# Altium PCB compactv2-5_changed.PcbDoc
Units mil, origin at the board's own origin, x right, y up, seen from the top; angles counter-clockwise.
Board outline 8000 x 8000 mil, 4 copper layers (LV, SIGLoop, OTHLoop, HV), stack 34.956 mil thick; 130 components, 24 nets, 206 pads, 4 vias.
Unrouted connection lines stored in the file: 27.
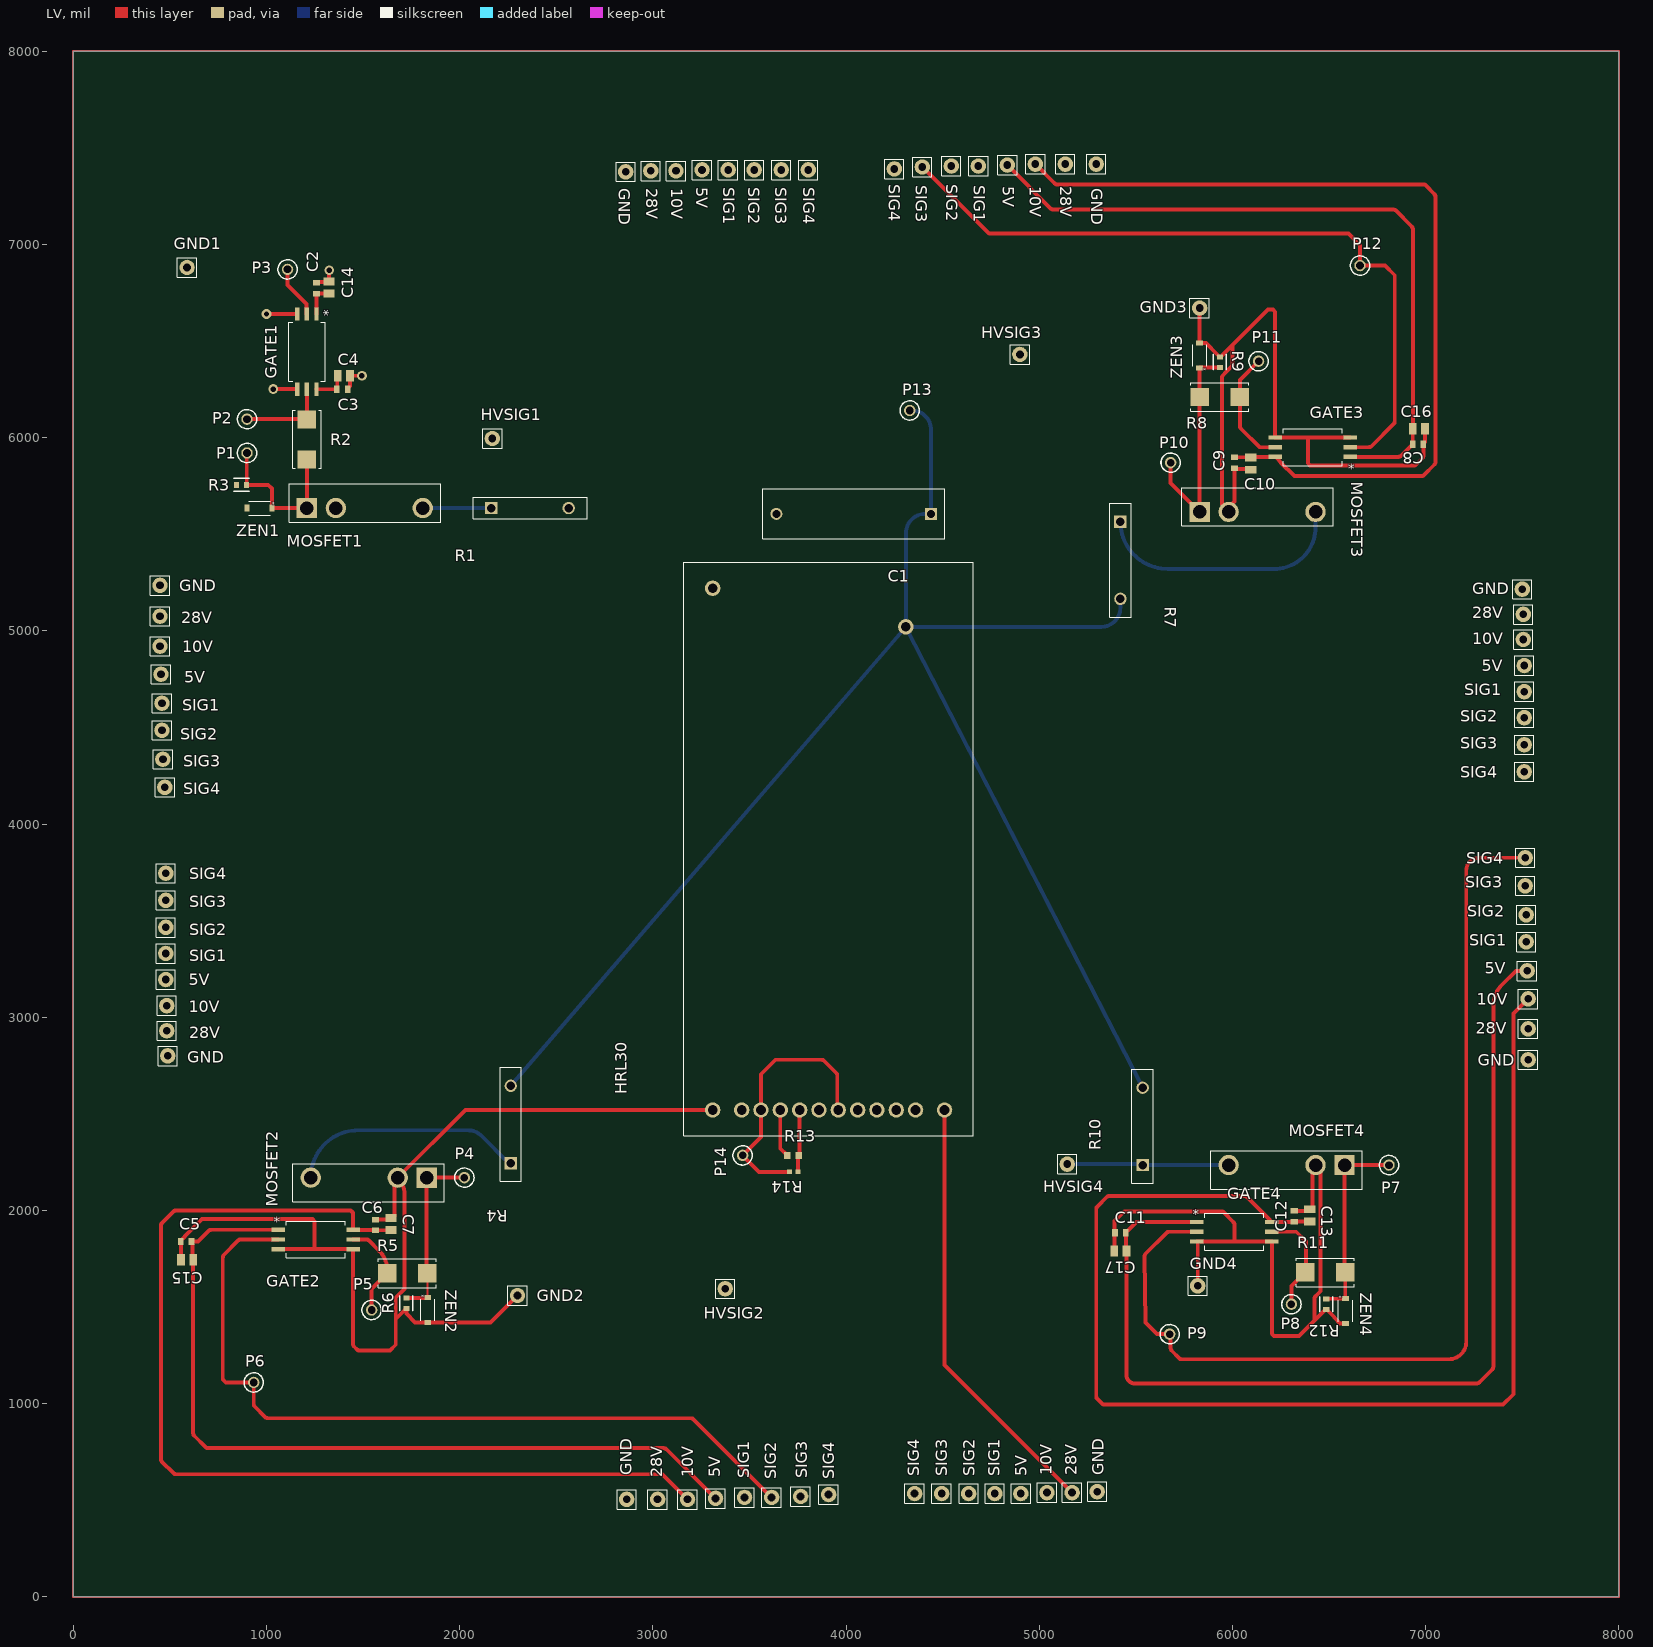
[diagram p0: LV view]
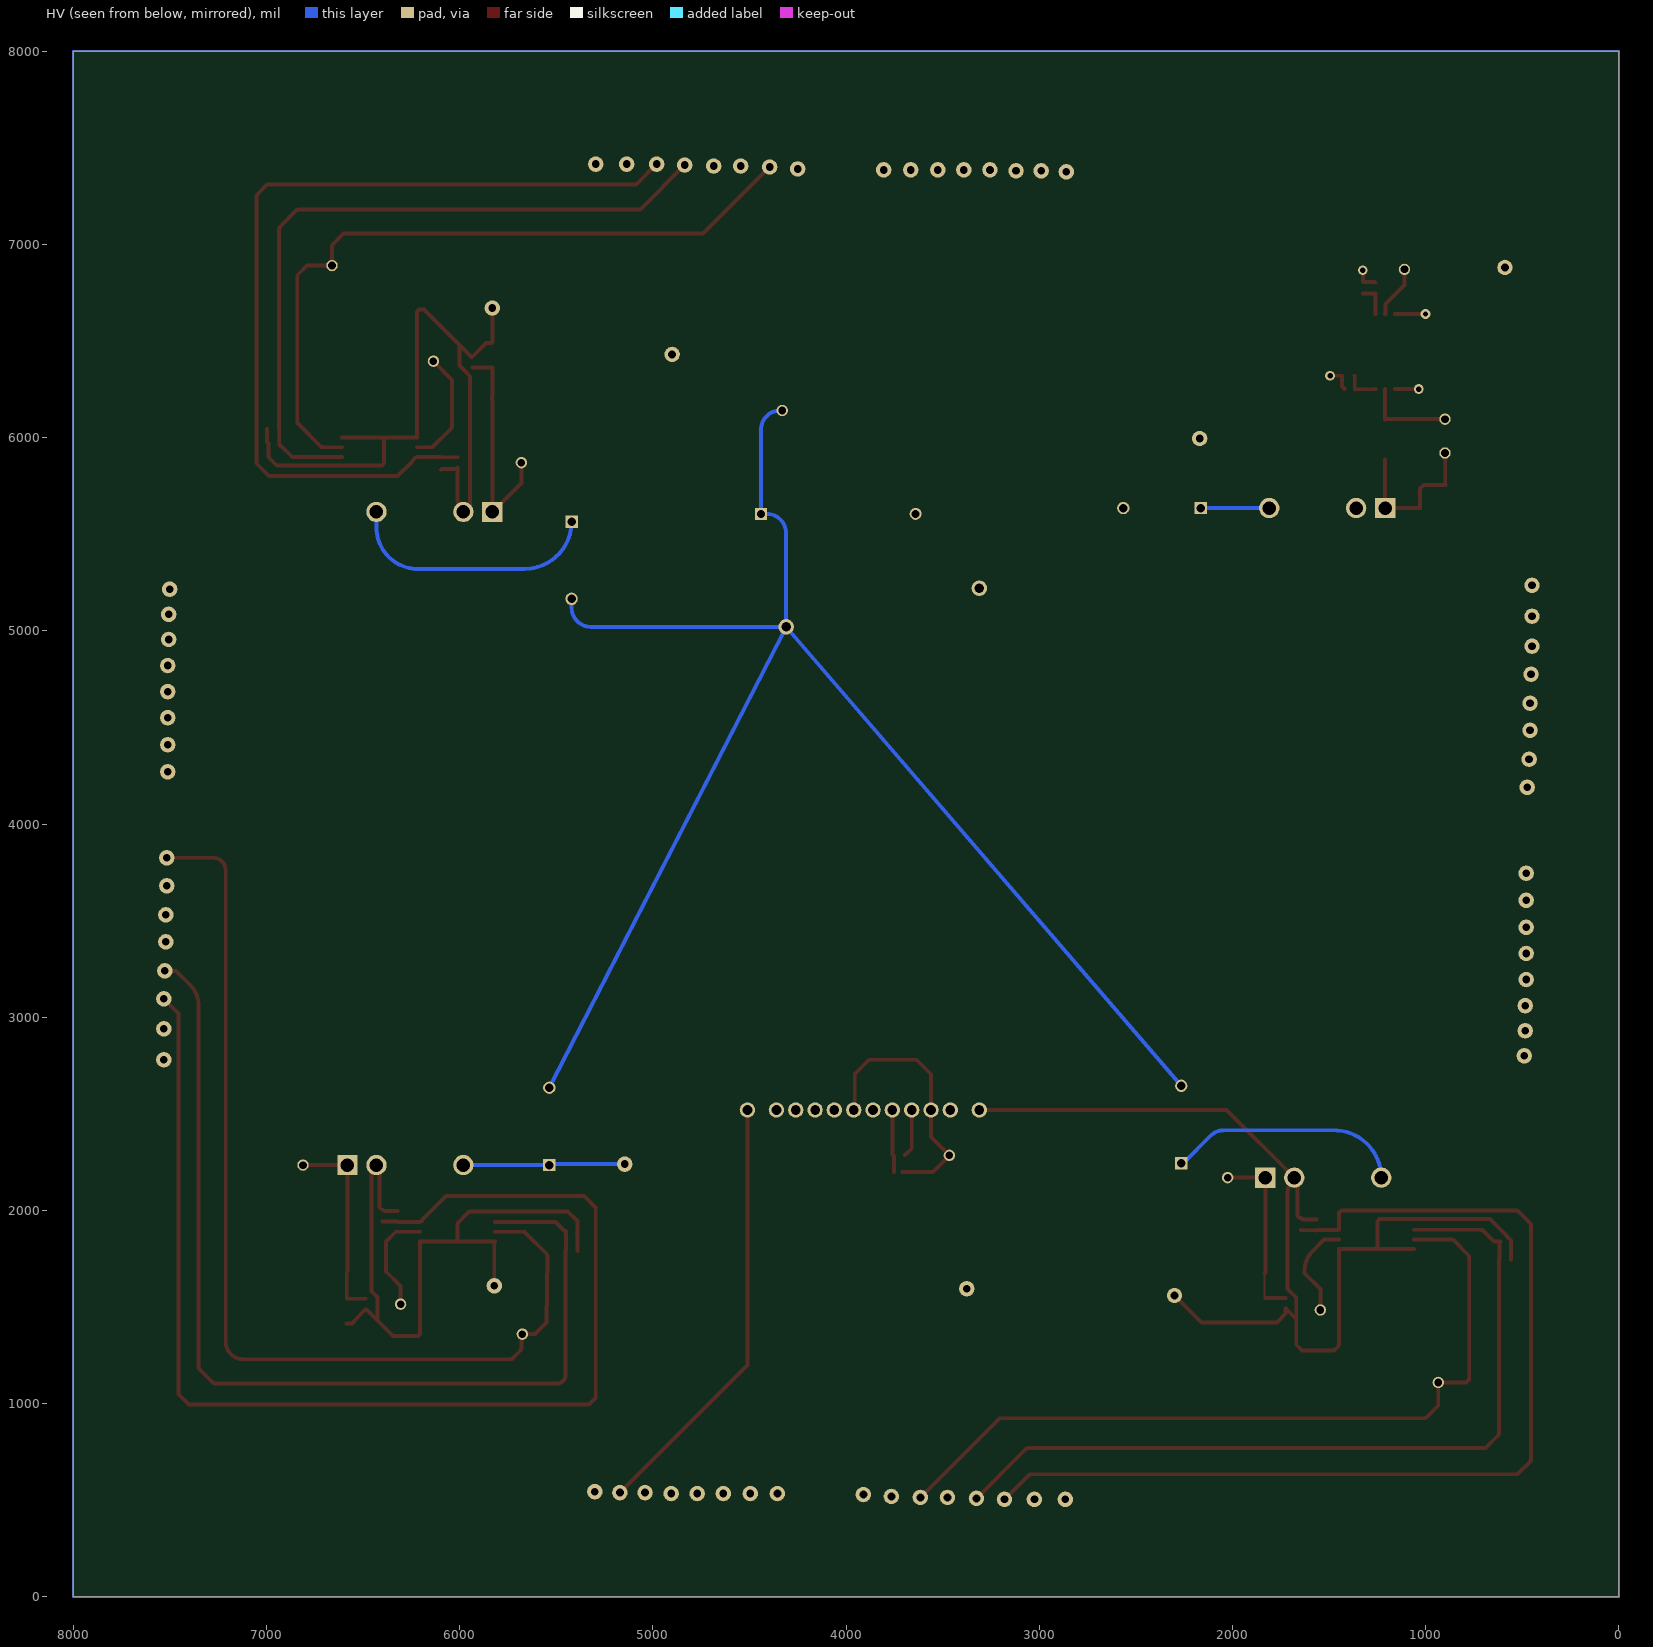
[diagram p1: HV view, seen from below]
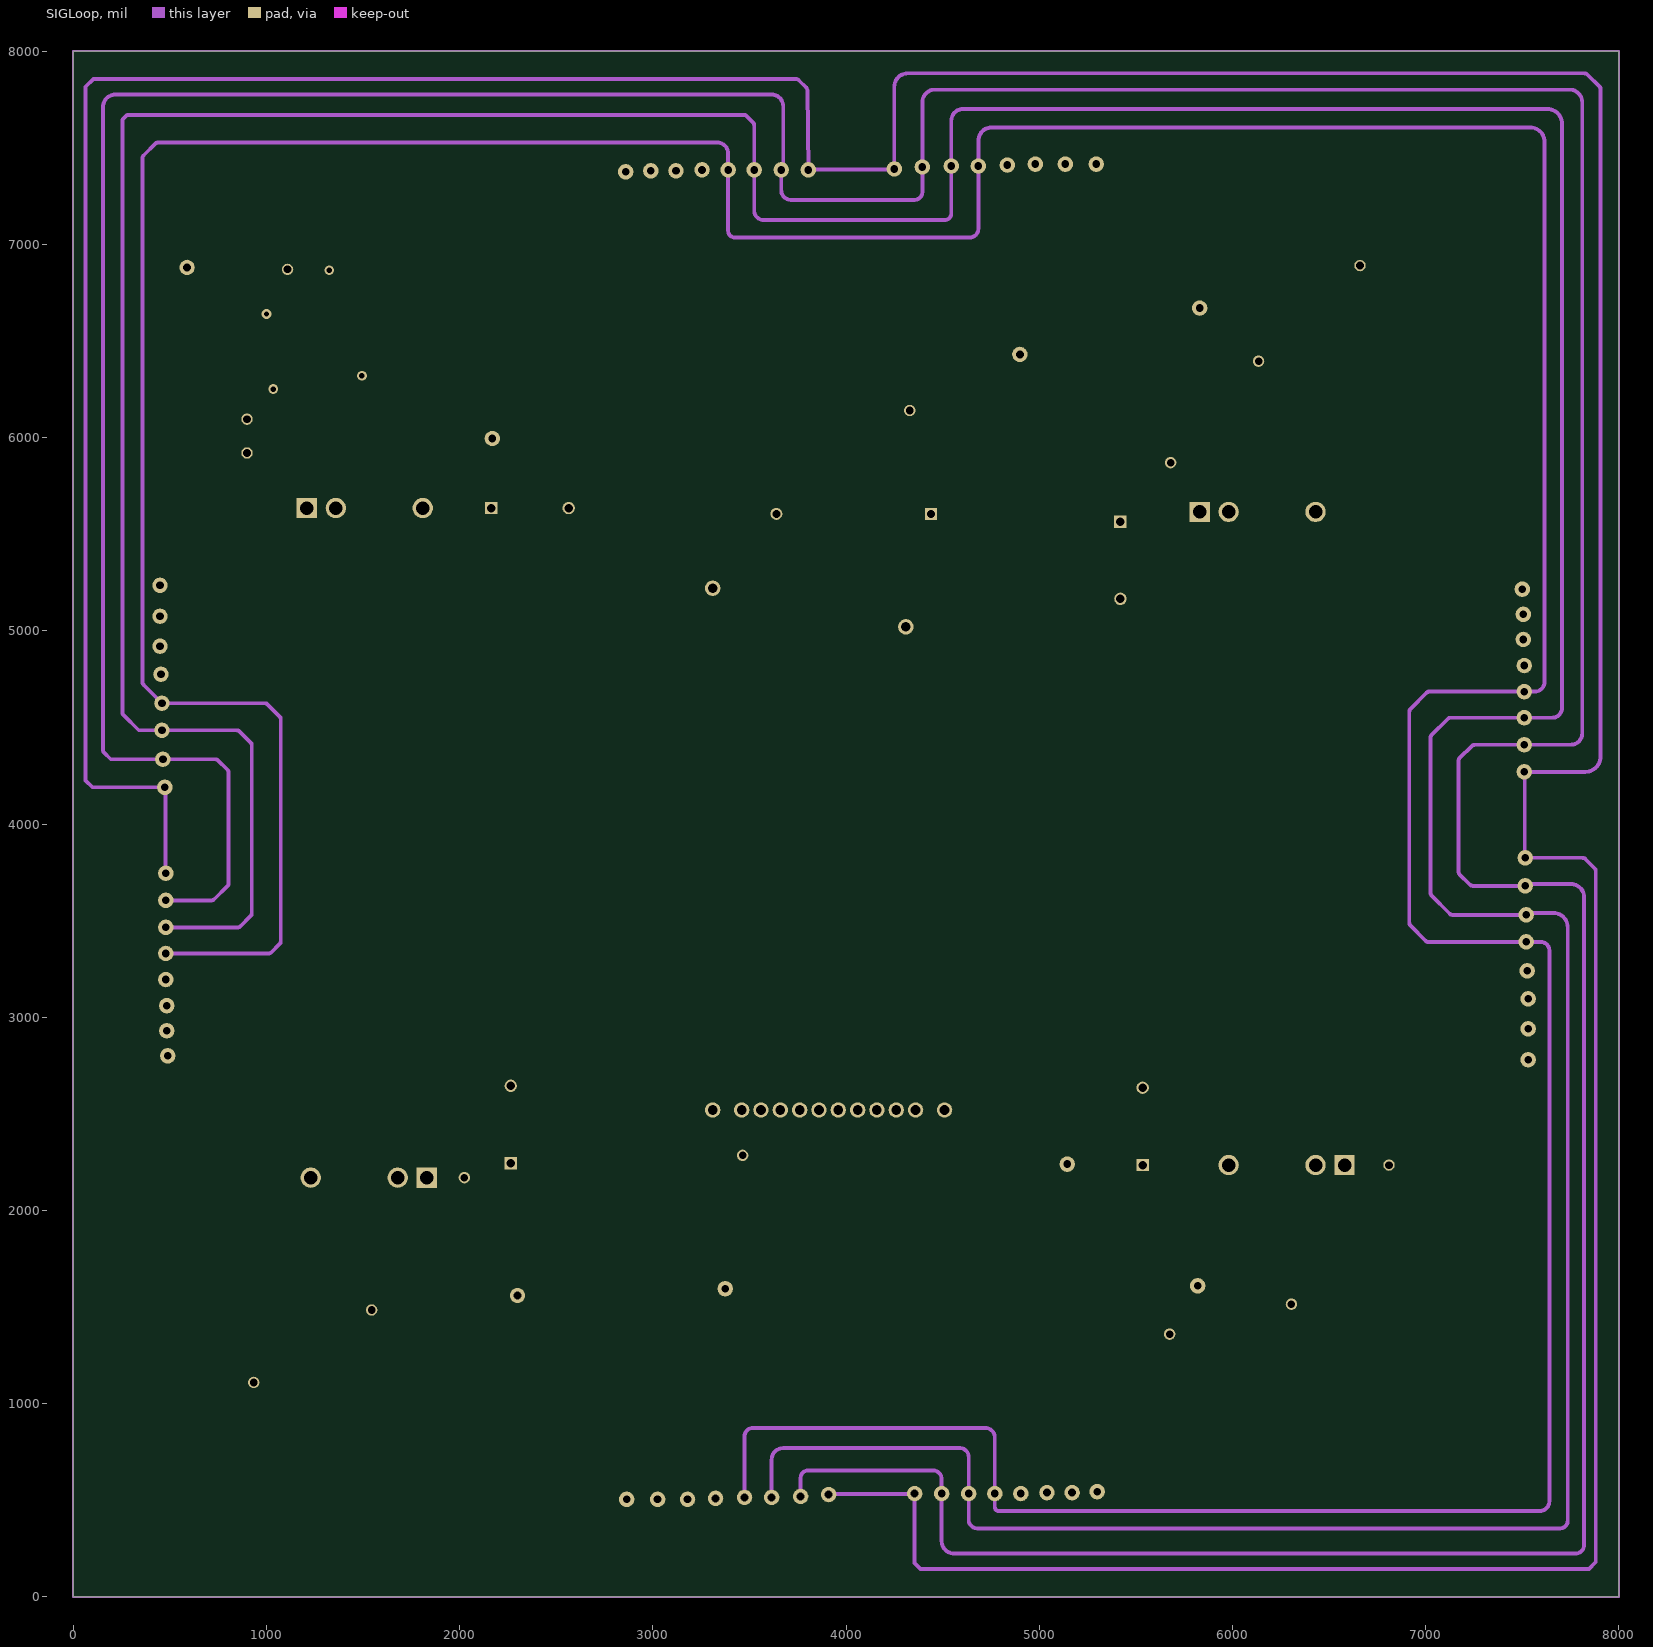
[diagram p2: SIGLoop]
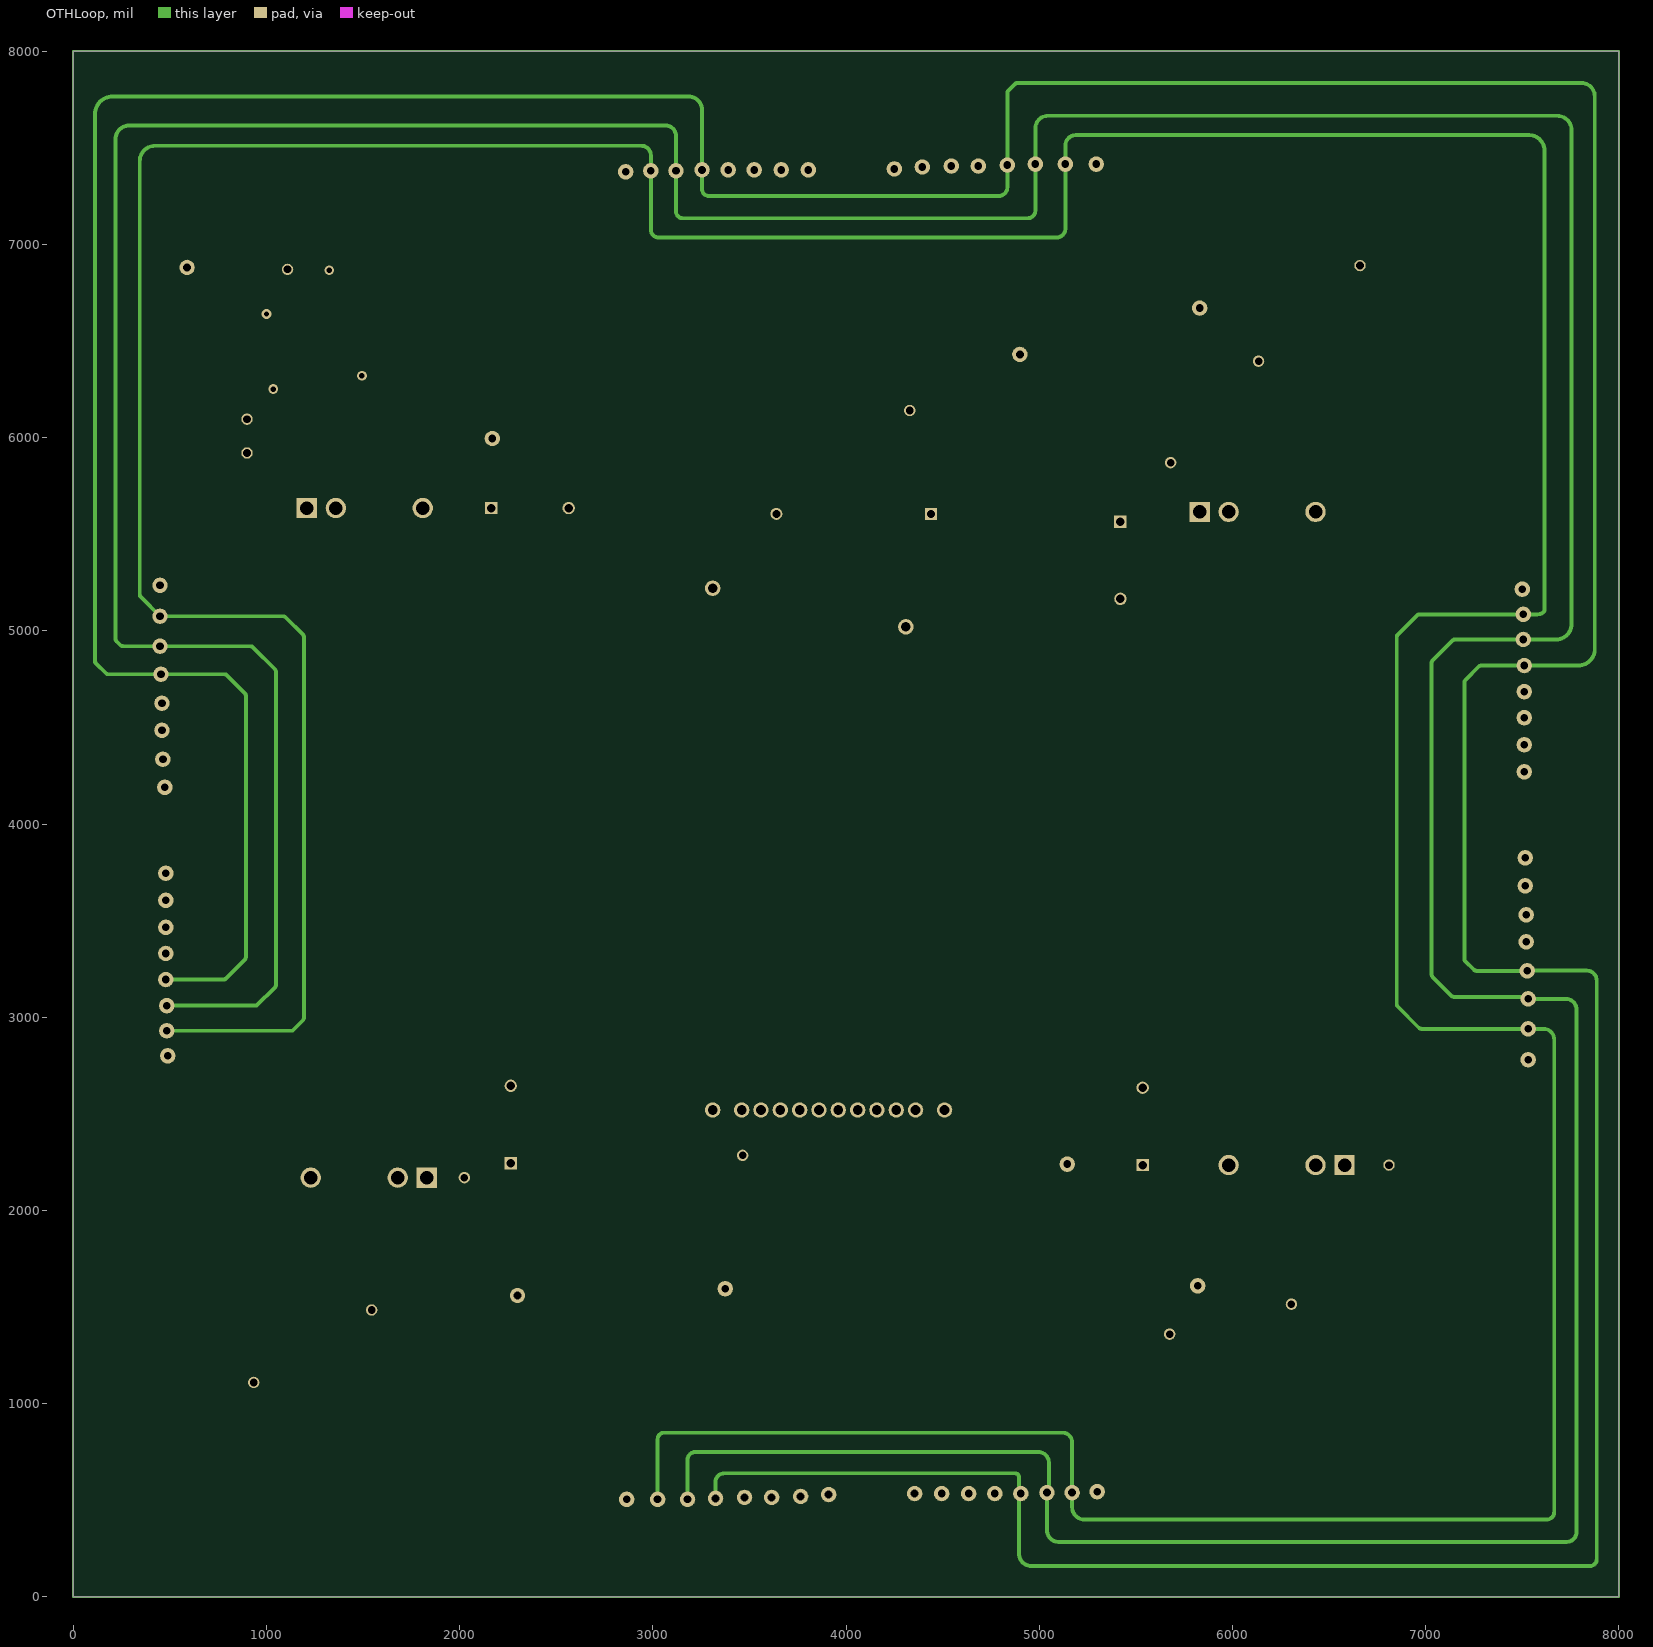
[diagram p3: OTHLoop]
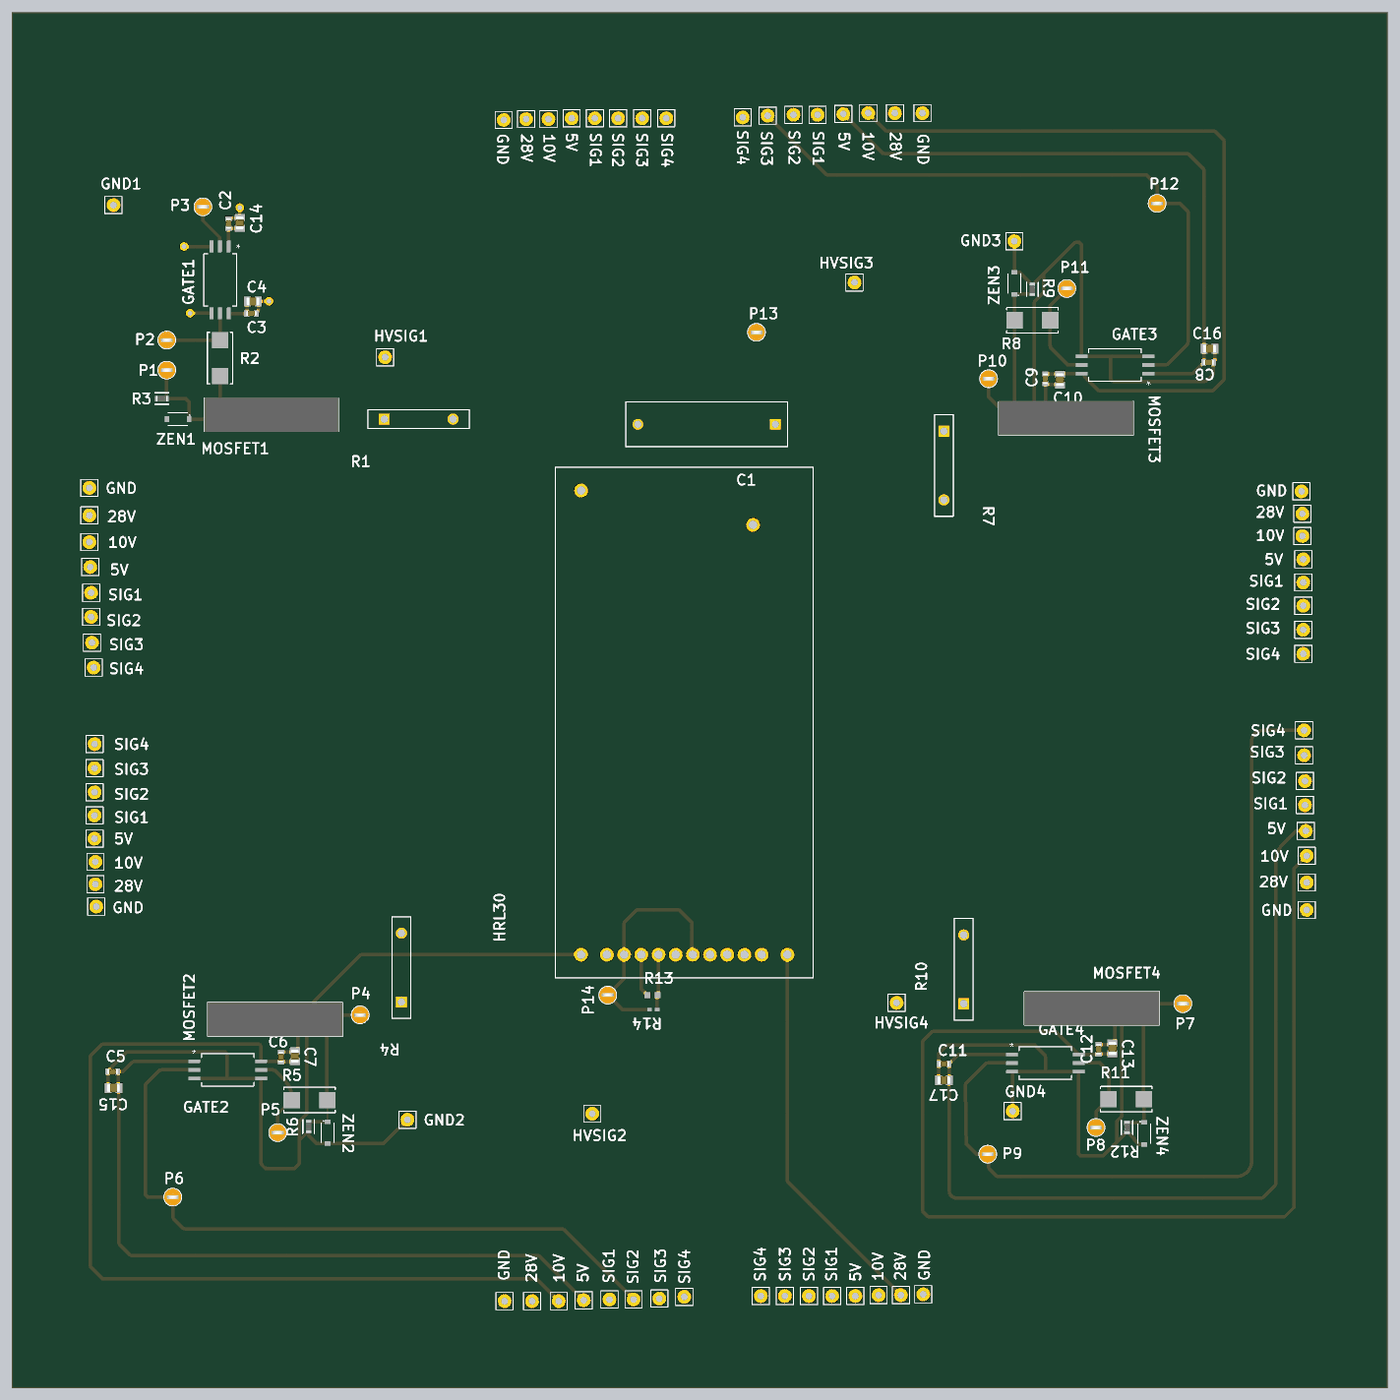
[diagram p4: 3D render of the assembled board from above, using the file's embedded part models]

## Layer stack, top to bottom
Top Solder: solder mask 0.4, Solder Resist, Dk 3.5
LV: signal copper 1.378
Dielectric 2: prepreg 2.8, PP-006, Dk 4.1
Dielectric 3: prepreg 2.8, PP-006, Dk 4.1
Dielectric 6: prepreg 2.8, PP-006, Dk 4.1
SIGLoop: signal copper 1.4
Dielectric 1: dielectric 12.6, FR-4, Dk 4.8
OTHLoop: signal copper 1.4
Dielectric 7: prepreg 2.8, PP-006, Dk 4.1
Dielectric 4: prepreg 2.8, PP-006, Dk 4.1
Dielectric 5: prepreg 2.8, PP-006, Dk 4.1
HV: signal copper 1.378
Bottom Solder: solder mask 0.4, Solder Resist, Dk 3.5

## Board outline
0,0 8000,0 8000,8000 0,8000

## Design rules (kind name [scope] priority, off if disabled: settings)
Clearance [All] p1: gap=10 ignorepadtopadclearanceinfootprint=FALSE except(0: Arc-Hole Track-Hole SMDPad-Hole THPad-Hole Via-Hole Fill-Hole Poly-Hole Region-Hole Text-Hole)
Height [All] p1 off: minheight=0 maxheight=1000 prefheight=500
PolygonConnect [All] p1: connectstyle=Relief reliefconductorwidth=10 reliefentries=4 polygonreliefangle="90 Angle" airgapwidth=10
RoutingVias [All] p1: holewidth=14 width=25 viastyle="Through Hole" minholewidth=14 minwidth=25 maxholewidth=28 maxwidth=50
SolderMaskExpansion [All] p1: expansion=4 istentingtop=FALSE
Width [All] p1 off: maxlimit=10 minlimit=10 preferedwidth=10
29 further rules are at their usual default settings.

## Classes and differential pairs
component class benchtopsch: C1 R1 R2 R3 R4 R5 R6 R7 R8 R9 R10 R13 R14

## Components (designator, comment, footprint, x,y, rotation, side; value= is the part's Value field where it differs from the comment)
5V "Comment" VIA 7525,3240 r180 top
5V "Comment" VIA 455,4775 r0 top
5V "Comment" VIA 3325,510 r90 top
5V "Comment" VIA 480,3195 r0 top
5V "Comment" VIA 4905,535 r90 top
5V "Comment" VIA 3255,7385 r270 top
5V "Comment" VIA 7510,4820 r180 top
5V "Comment" VIA 4835,7410 r270 top
10V "Comment" VIA 7530,3095 r180 top
10V "Comment" VIA 4980,7415 r270 top
10V "Comment" VIA 5040,540 r90 top
10V "Comment" VIA 450,4920 r0 top
10V "Comment" VIA 3180,505 r90 top
10V "Comment" VIA 3120,7380 r270 top
10V "Comment" VIA 7505,4955 r180 top
10V "Comment" VIA 485,3060 r0 top
28V "Comment" VIA 7505,5085 r180 top
28V "Comment" VIA 450,5075 r0 top
28V "Comment" VIA 2990,7380 r270 top
28V "Comment" VIA 3025,505 r90 top
28V "Comment" VIA 485,2930 r0 top
28V "Comment" VIA 5170,540 r90 top
28V "Comment" VIA 5135,7415 r270 top
28V "Comment" VIA 7530,2940 r180 top
C1 "Comment" "HV CAPACITOR" 4440,5605 r180 top
C2 "Comment" "1UF CAP" 1260,6772.95 r270 top
C3 "Comment" "1UF CAP" 1392.95,6250 r180 top
C4 "Comment" "10uF CAP" 1401.5,6320 r180 top
C5 "Comment" "1UF CAP" 585,1840 r0 top
C6 "Comment" "1UF CAP" 1565,1925 r270 top
C7 "Comment" "10uF CAP" 1645,1930 r270 top
C8 "Comment" "1UF CAP" 6960,5965 r180 top
C9 "Comment" "1UF CAP" 6010,5870 r90 top
C10 "Comment" "10uF CAP" 6095,5865 r90 top
C11 "Comment" "1UF CAP" 5420,1885 r0 top
C12 "Comment" "1UF CAP" 6320,1970 r270 top
C13 "Comment" "10uF CAP" 6400,1975 r270 top
C14 "Comment" "10UF CERAMIC CAPACITOR" 1325,6776.5 r270 top
C15 "Comment" "10UF CERAMIC CAPACITOR" 590,1745 r0 top
C16 "Comment" "10UF CERAMIC CAPACITOR" 6965,6045 r180 top
C17 "Comment" "10UF CERAMIC CAPACITOR" 5420,1790 r0 top
GATE1 "Comment" "GATE DRIVER" 1210,6445 r270 top
GATE2 "Comment" "GATE DRIVER" 1255,1850 r0 top
GATE3 "Comment" "GATE DRIVER" 6415,5950 r180 top
GATE4 "Comment" "GATE DRIVER" 6010,1890 r0 top
GND "Comment" VIA 7500,5215 r180 top
GND "Comment" VIA 490,2800 r0 top
GND "Comment" VIA 7530,2780 r180 top
GND "Comment" VIA 2865,505 r90 top
GND "Comment" VIA 2860,7375 r270 top
GND "Comment" VIA 5300,545 r90 top
GND "Comment" VIA 450,5235 r0 top
GND "Comment" VIA 5295,7415 r270 top
GND1 "Comment" VIA 590,6880 r0 top
GND2 "Comment" VIA 2300,1560 r0 top
GND3 "Comment" VIA 5830,6670 r0 top
GND4 "Comment" VIA 5820,1610 r0 top
HRL30 "Comment" "STEP UP CONVERTER" 4453.7,2505.43 r90 top
HVSIG1 "Comment" VIA 2170,5995 r0 top
HVSIG2 "Comment" VIA 3375,1595 r0 top
HVSIG3 "Comment" VIA 4900,6430 r0 top
HVSIG4 "Comment" VIA 5145,2240 r0 top
MOSFET1 "Comment" MOSFET 1210,5635 r0 top
MOSFET2 "Comment" MOSFET 1830,2170 r180 top
MOSFET3 "Comment" MOSFET 5830,5615 r0 top
MOSFET4 "Comment" MOSFET 6580,2235 r180 top
P1 "Comment" KSTN-5003 900,5920 r0 top
P2 "Comment" KSTN-5003 900,6095 r0 top
P3 "Comment" KSTN-5003 1110,6870 r0 top
P4 "Comment" KSTN-5003 2025,2170 r0 top
P5 "Comment" KSTN-5003 1545,1485 r0 top
P6 "Comment" KSTN-5003 935,1110 r0 top
P7 "Comment" KSTN-5003 6810,2235 r0 top
P8 "Comment" KSTN-5003 6305,1515 r0 top
P9 "Comment" KSTN-5003 5675,1360 r0 top
P10 "Comment" KSTN-5003 5680,5870 r0 top
P11 "Comment" KSTN-5003 6135,6395 r0 top
P12 "Comment" KSTN-5003 6660,6890 r0 top
P13 "Comment" KSTN-5003 4330,6140 r0 top
P14 "Comment" KSTN-5003 3465,2285 r0 top
R1 "Comment" "HV RESISTOR" 2165,5635 r0 top
R2 "Comment" "ZENER RESISTOR" 1210,5990 r270 top
R3 "Comment" "LV RESISTOR" 871.64,5755 r180 top
R4 "Comment" "HV RESISTOR" 2265,2245 r90 top
R5 "Comment" "ZENER RESISTOR" 1730,1675 r0 top
R6 "Comment" "LV RESISTOR" 1725,1520 r270 top
R7 "Comment" "HV RESISTOR" 5420,5565 r270 top
R8 "Comment" "ZENER RESISTOR" 5935,6210 r180 top
R9 "Comment" "LV RESISTOR" 5935,6390 r90 top
R10 "Comment" "HV RESISTOR" 5535,2235 r90 top
R11 "Comment" "ZENER RESISTOR" 6480,1680 r0 top
R12 "Comment" "LV RESISTOR" 6485,1515 r270 top
R13 "Comment" "330 OHM" 3725,2285 r0 top
R14 "Comment" "180 OHM" 3730,2200 r180 top
SIG1 "Comment" VIA 3390,7385 r270 top
SIG1 "Comment" VIA 3475,515 r90 top
SIG1 "Comment" VIA 480,3330 r0 top
SIG1 "Comment" VIA 460,4625 r0 top
SIG1 "Comment" VIA 4685,7405 r270 top
SIG1 "Comment" VIA 4770,535 r90 top
SIG1 "Comment" VIA 7510,4685 r180 top
SIG1 "Comment" VIA 7520,3390 r180 top
SIG2 "Comment" VIA 7520,3530 r180 top
SIG2 "Comment" VIA 4545,7405 r270 top
SIG2 "Comment" VIA 4635,535 r90 top
SIG2 "Comment" VIA 460,4485 r0 top
SIG2 "Comment" VIA 3525,7385 r270 top
SIG2 "Comment" VIA 7510,4550 r180 top
SIG2 "Comment" VIA 480,3465 r0 top
SIG2 "Comment" VIA 3615,515 r90 top
SIG3 "Comment" VIA 7510,4410 r180 top
SIG3 "Comment" VIA 4495,535 r90 top
SIG3 "Comment" VIA 3665,7385 r270 top
SIG3 "Comment" VIA 480,3605 r0 top
SIG3 "Comment" VIA 465,4335 r0 top
SIG3 "Comment" VIA 4395,7400 r270 top
SIG3 "Comment" VIA 7515,3680 r180 top
SIG3 "Comment" VIA 3765,520 r90 top
SIG4 "Comment" VIA 3910,530 r90 top
SIG4 "Comment" VIA 480,3745 r0 top
SIG4 "Comment" VIA 4355,535 r90 top
SIG4 "Comment" VIA 3805,7385 r270 top
SIG4 "Comment" VIA 7510,4270 r180 top
SIG4 "Comment" VIA 7515,3825 r180 top
SIG4 "Comment" VIA 475,4190 r0 top
SIG4 "Comment" VIA 4250,7390 r270 top
ZEN1 "Comment" "ZENER DIODE" 965,5635 r180 top
ZEN2 "Comment" "ZENER DIODE" 1835,1485 r270 top
ZEN3 "Comment" "ZENER DIODE" 5830,6425 r90 top
ZEN4 "Comment" "ZENER DIODE" 6585,1480 r270 top

## Footprints (in the part's own frame and the unit in brackets; to place one, negate y for a bottom-side part, rotate by r counter-clockwise, add the part's x,y. Pads: shape width x height; smd on the part's side, far side on the other; paste and mask are expansions set on the pad)
"1UF CAP" [mm]
  rect 0.73x0.94 smd: 1(-0.71,0) 2(0.71,0)
  body extent -0.8,-0.4 0.8,0.4, height 0.9
"10uF CAP" [mm]
  rect 1.02x1.47 smd: 1(-0.8,0) 2(0.8,0)
  body extent -1,-0.63 1,0.63, height 1.45
"10UF CERAMIC CAPACITOR" [mm] "C0805C106K3PAC7800"
  rect 1.02x1.47 smd: 1(-0.8,0) 2(0.8,0)
  body extent -1,-0.63 1,0.63, height 1.45
"180 OHM" [mil] "RES_RK73H1E_KOA"
  rect 26x22 smd paste+0 mask+0: 1(-22.5,0) 2(22.5,0)
  body extent 0,0 10,10, height 10
"330 OHM" [mm] "RESC1508X55N"
  rect 0.87x0.93 smd: 1(-0.755,0) 2(0.755,0)
"GATE DRIVER" [mil] "ADuM4120"
  rect 69.53x22.08 smd paste+0 mask+0: 1(-194.13,50) 2(-194.13,0) 3(-194.13,-50) 4(194.13,-50) 5(194.13,0) 6(194.13,50)
  silkscreen extent -153,-95 153,95, body extent 0,0 10,10, height 10
"HV CAPACITOR" [mil] "SV17_AVX"
  rect 62x62 hole 42 mask+0: 1(0,0)
  round 62 hole 42 mask+0: 2(800,0)
  silkscreen extent -70,-130 870,130, body extent 0,0 10,10, height 10
"HV RESISTOR" [mil] "RES_SM10203_OHM"
  rect 64x64 hole 44 mask+0: 1(0,0)
  round 64 hole 44 mask+0: 2(400,0)
  silkscreen extent -95,-55 495,55, body extent 0,0 10,10, height 10
KSTN-5003 [mm] "Test Point, Through Hole, Dia 2.54mm"
  round 1.5 hole 1: 1(0,0)
  silkscreen extent -1.27,-1.27 1.27,1.27, body extent -1.27,-1.27 1.27,1.27, height 4.57
"LV RESISTOR" [mil] "Yageo_AC0603_IPC_C"
  rect 25.93x31.97 smd paste+0 mask+0: 1(-26.64,0) 2(26.64,0)
  silkscreen extent -40,-33 40,33, body extent -44,-22 44,22, height 10
MOSFET [mm]
  rect 2.67x2.67 hole 1.78: 1(0,0)
  round 2.67 hole 1.78: 2(3.81,0) 3(15.24,0)
  silkscreen extent -2.34,-1.85 17.58,3.17, body extent -2.34,-1.85 17.58,3.17, height 26.52
"STEP UP CONVERTER" [mil] "HRL30"
  round 80 hole 50: 1(14.57,1143.7) 2(14.57,993.7) 3(14.57,893.7) 4(14.57,793.7) 5(14.57,693.7) 6(14.57,593.7) 7(14.57,493.7) 8(14.57,393.7) 9(14.57,293.7) 10(14.57,193.7) 11(14.57,93.7) 12(14.57,-56.3) 13(2514.57,143.7) 14(2714.57,1143.7)
  silkscreen extent -120,-206 2850,1294
VIA [mil]
  round 80 hole 40: VIA(0,0)
  silkscreen extent -50,-50 50,50
"ZENER DIODE" [mil] "KDZVTR16B"
  rect 26x35 smd paste+0 mask+0: 1(-64,0) 2(64,0)
  silkscreen extent -56,-37 56,37, body extent 0,0 10,10, height 10
"ZENER RESISTOR" [mil] "BO_PWR3014"
  rect 95x95 smd paste+0 mask+0: 1(-103.5,0) 2(103.5,0)
  silkscreen extent -150,-74 150,74, body extent 0,0 10,10, height 10

## Part data
C1: library part Capacitor
R1 R2 R3 R4 R5 R6 R7 R8 R9 R10 R13 R14: library part Resistor

## Via types
v1: diameter 50, hole 28, LV to HV, 4 vias

## Nets (pads, with @x,y where several pads share a name; then routed paths per layer and width w, separated by ;. In a path a pad name is that pad's centre, name@x,y a point inside that pad or via, vN(x,y) a via of type N, cw(c..) or ccw(c..) an arc to the next point about the centre after c; other vN are vias at no path point)
3kV: C1.1 HRL30.13 P13.1 R1.2 R4.2 R7.2 R10.2 | length 8304.3
  LV w10: HRL30.13 HRL30.13@4310,5027.78
  HV w20: R4.2 HRL30.13 ; HRL30.13@4315,5020 5320,5020 ccw(c5320,5120) 5420,5120 R7.2 ; P13.1 4340,6140 cw(c4340,6040) 4440,6040 C1.1 4410,5605 ccw(c4410,5505) 4310,5505 HRL30.13 ; R10.2 HRL30.13
5V: 5V.VIA C2.2 C5.2 C8.2 C11.2 C14.2 C15.2 C16.2 C17.2 GATE1.1 GATE2.1 GATE3.1 GATE4.1 | length 41728.3
  LV w20: GATE2.1 714.71,1900 714.65,1900 ccw(c714.71,1880) 700.61,1894.18 646.43,1840 C5.2 617.22,1835.73 617.22,1749.27 C15.2 621.5,848.06 ccw(c641.5,848.06) 627.32,833.96 685.47,775.8 ccw(c699.56,790) 699.5,770 3056.72,770 cw(c3056.72,750) 3070.86,764.14 5V.VIA@3325,510 ; GATE1.1 C2.2 C14.2 ; 5V.VIA@4835,7410 5059.14,7185.86 5059.18,7185.82 ccw(c5073.28,7200) 5073.28,7180 6831.72,7180 cw(c6831.72,7160) 6845.86,7174.14 6927.68,7092.32 cw(c6913.5,7078.21) 6933.5,7078.21 C16.2 6932.78,6044.27 6932.78,5965.73 C8.2 6932.05,5960.87 6927.68,5956.5 6923.54,5956.5 6872.91,5905.86 cw(c6858.76,5920) 6858.76,5900 GATE3.1 ; GATE4.1 5502.95,1940 5456.46,1893.5 5452.32,1893.5 5447.95,1889.13 C11.2 5449.72,1883.23 5449.72,1791.77 C17.2 5451.5,1146.5 ccw(c5492.99,1146.5) 5492.99,1105 7263.76,1105 ccw(c7263.76,1125) 7277.91,1110.86 7344.2,1177.15 ccw(c7330,1191.24) 7350,1191.24 7350,3061.81 cw(c7498.24,3061.1) 7392.89,3165.39 7465,3237.5 cw(c7471.61,3230) 7471.57,3240 5V.VIA@7525,3240
  OTHLoop w10: 5V.VIA@4895,545 5V.VIA@4905,535
  OTHLoop w20: 5V.VIA@480,3195 776.72,3195 ccw(c776.72,3215) 790.82,3200.82 889.18,3299.18 ccw(c875,3313.28) 895,3313.28 895,4661.72 ccw(c875,4661.72) 889.11,4675.89 795.8,4769.2 ccw(c781.72,4755) 781.72,4775 455,4775 183.28,4775 cw(c183.28,4795) 169.19,4780.81 119.11,4830.89 cw(c133.28,4845) 113.28,4845 113.28,7673.19 113.28,7673.26 cw(c205.29,7672.99) 205,7765 3185,7765 cw(c3185,7695) 3255,7695 3255,7385 3255,7285 ccw(c3290,7285) 3290,7250 4790.05,7250 4790.12,7250 ccw(c4790,7295) 4835,7295 4835,7781.78 cw(c4855,7781.72) 4840.8,7795.8 4874.14,7829.14 cw(c4888.28,7815) 4888.28,7835 7805,7835 cw(c7805,7765) 7875,7765 7875,4905 cw(c7790,4905) 7790,4820 7510,4820 7288.28,4820 7288.22,4820 ccw(c7288.28,4800) 7274.18,4814.18 7205.86,4745.86 7201.14,4738.38 ccw(c7220,4731.72) 7200,4731.72 7200,3303.28 ccw(c7220,3303.28) 7205.82,3289.18 7249.2,3245.8 ccw(c7263.28,3260) 7263.22,3240 5V.VIA@7525,3240 ; 5V.VIA@3325,510 3325,595.19 3325,595.25 cw(c3369.86,595.14) 3370.03,640 4875,640 cw(c4875,620) 4895,620 5V.VIA@4895,545 ; 5V.VIA@4905,535 ccw(c4943.28,505.58) 4895,505.58 4895,225.09 ccw(c4960.21,225.21) 4960.03,160 4960.09,160 7850,160 ccw(c7850,195) 7885,195 7885,3189.97 ccw(c7833.59,3189.84) 7833.59,3241.25 5V.VIA@7526.25,3241.25
10V: 10V.VIA C3.2 C4.2 C6.2 C7.2 C9.2 C10.2 C12.2 C13.2 GATE1.6 GATE2.6 GATE3.6 GATE4.6 | length 44680.1
  LV w10: C10.2@6093.54,5897.95 C10.2 C10.2@6098.5,5900 ; GATE4.6@6193.94,1946.04 GATE4.6 GATE4.6@6205.15,1941.02 ; GATE3.6 6227.17,5896.26 6227.22,5896.23 cw(c6222.04,5887.68) GATE3.6@6229.53,5894.3 ; 6251.5,5869.41 ccw(c6259.02,5875.99) 6251.91,5868.96 ; C12.2@6318.98,1941.02 C12.2 ; C13.2@6398.54,1942.05 C13.2
  LV w20: GATE1.6 1260.87,6250 C3.2 1367.5,6252.5 1367.5,6317.5 C4.2 ; C7.2 1644.27,1897.78 1565.73,1897.78 C6.2 1563.09,1898.96 1450.17,1898.96 GATE2.6 1449.13,1980 ccw(c1429.13,1980) 1429.13,2000 533.28,2000 ccw(c533.28,1980) 519.14,1994.14 460.8,1935.8 ccw(c475,1921.72) 455,1921.78 455,713.28 ccw(c475,713.28) 460.82,699.18 519.2,640.8 ccw(c533.28,655) 533.22,635 3041.72,635 cw(c3041.72,615) 3055.86,629.14 10V.VIA@3180,505 ; 10V.VIA@4980,7415 5079.14,7315.86 ccw(c5093.28,7330) 5093.28,7310 6986.72,7310 cw(c6986.72,7290) 7000.8,7304.2 7044.18,7260.82 cw(c7030,7246.72) 7050,7246.78 7050,7246.72 7050,5873.28 cw(c7030,5873.28) 7044.18,5859.18 6990.82,5805.82 cw(c6976.72,5820) 6976.72,5800 6324.97,5800 cw(c6325.02,5810) 6317.92,5802.95 6251.91,5868.96 ; C9.2 C10.2@6093.54,5897.95 ; C10.2@6098.5,5900 GATE3.6 ; GATE4.6@6193.94,1946.04 ccw(c6183.94,1946.04) 6191.06,1953.07 6074.98,2069.14 ccw(c6060.84,2055) 6060.84,2075 5363.28,2075 ccw(c5363.28,2055) 5349.18,2069.18 5300.8,2020.8 ccw(c5315,2006.72) 5295,2006.78 5295,1038.28 ccw(c5315,1038.28) 5300.82,1024.18 5300.86,1024.14 5324.2,1000.8 ccw(c5338.28,1015) 5338.22,995 7400.86,995 7455,1049.14 7455,3020 10V.VIA@7530,3095 ; GATE4.6@6205.15,1941.02 C12.2@6318.98,1941.02 ; GATE3.6@6229.53,5894.3 6251.5,5869.41 ; C12.2 C13.2@6398.54,1942.05
  OTHLoop w10: 10V.VIA@7520,3105 10V.VIA@7530,3095
  OTHLoop w20: 10V.VIA@485,3060 950,3060 1044.2,3154.2 ccw(c1030,3168.28) 1050,3168.28 1050,4786.72 1050,4786.78 ccw(c1030,4786.72) 1044.14,4800.86 930.86,4914.14 ccw(c916.72,4900) 916.72,4920 450,4920 258.28,4920 cw(c258.28,4940) 244.17,4925.83 225.86,4944.14 cw(c240,4958.28) 220,4958.28 220,7544.91 220,7544.97 cw(c290,7545) 290.05,7615 3065,7615 cw(c3065,7560) 3120,7560 3120,7380 3120,7170 ccw(c3155,7170) 3155,7135 4940.13,7135 ccw(c4940,7175) 4980,7175 4980,7599.91 4980,7599.97 cw(c5045.21,7599.79) 5045,7665 7680,7665 cw(c7680,7590) 7755,7590 7755,5035 cw(c7675,5035) 7675,4955 7505,4955 7153.28,4955 7153.22,4955 ccw(c7153.28,4935) 7139.18,4949.18 7035.8,4845.8 ccw(c7050,4831.72) 7030,4831.78 7030,3223.28 ccw(c7050,3223.28) 7035.82,3209.18 7134.2,3110.8 ccw(c7148.28,3125) 7148.22,3105 10V.VIA@7520,3105 ; 10V.VIA@3180,505 3180,710.16 3180,710.22 cw(c3219.88,710.12) 3219.91,750 4995,750 cw(c4995,695) 5050,695 5050,558.28 cw(c5030,558.28) 5044.14,544.14 5040,540 5040,345 ccw(c5100,345) 5100,285 7730,285 ccw(c7730,335) 7780,335 7780,3040.06 ; 10V.VIA@7530,3095 7725.17,3095 cw(c7725.17,3040.17) 7780,3040.1
28V: 28V.VIA HRL30.12 | length 30282.8
  LV w20: HRL30.12 4510,1204.14 ccw(c4520,1204.14) 4512.93,1197.07 28V.VIA@5170,540
  OTHLoop w20: 28V.VIA@485,2930 1135,2930 1189.18,2984.18 ccw(c1175,2998.28) 1195,2998.28 1195,4966.72 1195,4966.78 ccw(c1175,4966.72) 1189.18,4980.82 1100.8,5069.2 ccw(c1086.72,5055) 1086.72,5075 450,5075 350.86,5174.14 350.82,5174.18 cw(c365,5188.28) 345,5188.28 345,7430 cw(c425,7430) 425,7510 2940,7510 cw(c2940,7460) 2990,7460 2990,7380 2990,7075 ccw(c3030,7075) 3030,7035 5090.05,7035 5090.12,7035 ccw(c5090,7080) 5135,7080 5135,7510.25 5135,7510.32 cw(c5189.83,7510.17) 5190.03,7565 7535,7565 cw(c7535,7485) 7615,7485 7615,5110.22 cw(c7595,5110.28) 7605.67,5093.36 cw(c7576.72,5139.28) 7576.72,5085 7505,5085 6968.28,5085 6968.22,5085 ccw(c6968.28,5065) 6954.18,5079.18 6855.8,4980.8 ccw(c6870,4966.72) 6850,4966.78 6850,3068.28 ccw(c6870,3068.28) 6855.82,3054.18 6964.2,2945.8 ccw(c6978.28,2960) 6978.22,2940 7530,2940 7609.83,2940 cw(c7609.83,2884.83) 7665,2885.01 ; 28V.VIA@3025,505 3025,815.13 3025,815.19 cw(c3059.89,815.11) 3059.93,850 5120,850 cw(c5120,800) 5170,800 5170,540 5170,465.03 ccw(c5235.29,465.29) 5235.06,400 7625,400 ccw(c7625,440) 7665,440 7665,2884.96
GND: C1.2 C2.1 C3.1 C4.1 C5.1 C6.1 C7.1 C8.1 C9.1 C10.1 C11.1 C12.1 C13.1 C14.1 C15.1 C16.1 C17.1 GATE1.3 GATE1.4 GATE2.3 GATE2.4 GATE3.3 GATE3.4 GATE4.3 GATE4.4 GND1.VIA GND2.VIA GND3.VIA GND4.VIA GND.VIA HRL30.1 HRL30.14 MOSFET1.2 MOSFET2.2 MOSFET3.2 MOSFET4.2 R3.2 R6.2 R9.2 R12.2 ZEN1.2 ZEN2.2 ZEN3.2 ZEN4.2 | length 13925.3
  LV w10: GATE4.3 GATE4.3@5820,1835.87 ; ZEN3.2@5830,6493.5 ZEN3.2@5834.5,6489 ; R9.2@5924.01,6427.49 5924.01,6424.61 5931.98,6416.64 R9.2 ; 6526.67,1446.69 6526.67,1449.71 ; ZEN4.2 ZEN4.2@6589.5,1416
  LV w20: C15.1 557.78,1745.73 557.78,1839.27 C5.1 557.05,1844.13 576.16,1863.24 576.16,1864.36 666.79,1955 1238.28,1955 1250,1943.28 1250,1805 1255,1800 ; v1@1000,6640 v1(1000.87,6639.13) GATE1.3 ; v1@1035,6250 v1(1035.87,6250.87) GATE1.4 ; GATE2.3 1255,1800 ; C2.1 1263.54,6804.45 1321.46,6804.45 C14.1 v1(1325,6865) ; C3.1 1420.91,6254.13 1432.99,6266.22 C4.1 v1(1495,6320) ; C6.1 1628.17,1952.95 ccw(c1628.17,1972.95) 1642.31,1958.81 C7.1 1653.63,1961.5 1663.71,1971.57 1663.71,2153.71 MOSFET2.2 ; GND2.VIA 2161,1421 ZEN2.2 1770.38,1421 1725,1466.38 R6.2 1721.98,1493.36 1719.01,1490.39 1719.01,1487.37 1670,1438.36 ; HRL30.1 2030,2520 MOSFET2.2 ; C17.1 5390.28,1791.77 5390.28,1883.23 C11.1 5390,1887.05 5390,1945 5440,1995 5941.72,1995 cw(c5941.72,1975) 5955.86,1989.14 6004.14,1940.86 cw(c5990,1926.72) 6010,1926.72 6010,1840 ; GATE4.3 6010,1840 ; GND4.VIA GATE4.3@5820,1835.87 ; ZEN3.2@5830,6493.5 GND3.VIA ; ZEN3.2@5834.5,6489 5862.5,6489 R9.2@5924.01,6427.49 ; R9.2 5938.02,6416.64 6000.69,6479.31 ; MOSFET3.2 5980,5638.03 6010,5668.03 C9.1 6014.27,5837.78 6090.73,5837.78 C10.1 ; MOSFET3.2 ccw(c5960.65,5609.96) 5974.83,5624.06 5950.86,5648.03 cw(c5965,5662.17) 5945,5662.17 5945,6307.85 cw(c5965,6307.85) 5950.86,6321.99 5964.48,6335.61 6000.69,6371.81 6000.69,6479.31 ; C12.1 6383.17,1997.95 ccw(c6383.17,2017.95) 6397.31,2003.81 C13.1 6404.92,2006.5 6415,2016.57 6415,2220 MOSFET4.2 6439,2226 6449.14,2215.86 cw(c6435,2201.72) 6455,2201.72 6455,1792.15 6455,1582.15 6430.86,1558.01 ccw(c6445,1543.87) 6425,1543.87 6425,1431.38 ; 6526.67,1446.69 6557.36,1416 ZEN4.2 ; 6526.67,1449.71 6488.02,1488.36 R12.2 6481.98,1488.36 6425,1431.38 ; GATE3.3 6390,6000 ; C16.1 6996.5,5977.68 6987.95,5969.13 C8.1 6987.95,5906.24 cw(c6967.95,5906.24) 6982.15,5892.15 6950.82,5860.82 cw(c6936.72,5875) 6936.72,5855 6401.72,5855 6390,5866.72 6390,6000 ; 1255,1800 GATE2.4 1449.13,1309.16 ccw(c1469.13,1309.16) 1454.95,1295.05 1469.2,1280.8 ccw(c1483.28,1295) 1483.22,1275 1640,1275 1670,1305 1670,1438.36 ; 1670,1438.36 1670,1548.88 1715,1593.88 1715,2079.69 1715,2085.41 ccw(c1595.5,2085.5) MOSFET2.2 ; 6000.69,6479.31 6183.97,6662.59 6209.16,6662.59 6220.87,6650.87 GATE3.4 6390,6000 ; 6010,1840 GATE4.4 6204.13,1361.72 6215.84,1350 6343.62,1350 6425,1431.38
HVSIG1: HVSIG1.VIA MOSFET1.3 R1.1 | length 355
  HV w20: MOSFET1.3 R1.1
HVSIG2: HVSIG2.VIA MOSFET2.3 R4.1 | length 1240
  HV w20: MOSFET2.3 cw(c1475,2170) 1475,2415 2042.48,2415 cw(c2042.57,2312.57) 2115.09,2384.91 2249.19,2250.81 ccw(c2263.28,2265) 2263.22,2245 R4.1
HVSIG3: HVSIG3.VIA MOSFET3.3 R7.1 | length 1352.6
  HV w20: R7.1 ccw(c5665,5565) 5665,5320 6215,5320 ccw(c6215,5535) 6430,5535 MOSFET3.3
HVSIG4: HVSIG4.VIA MOSFET4.3 R10.1 | length 830
  HV w20: HVSIG4.VIA R10.1@5530,2240 ; R10.1 MOSFET4.3
NetB1: HRL30.3 HRL30.7 P14.1 R14.2 | length 1380.4
  LV w10: HRL30.7@3955,2525 HRL30.7
  LV w20: R14.2 3550,2200 P14.1 3560,2380 HRL30.3 3560,2705 3635,2780 3875.86,2780 cw(c3875.86,2770) 3882.89,2777.11 3952.09,2707.91 cw(c3945,2700.86) 3955,2700.9 ; HRL30.7@3955,2525 3955,2700.86
NetB2: HRL30.5 R13.2 R14.1 | length 323.1
  LV w10: R13.2@3752.5,2282.78 R13.2 R13.2@3760,2290.28
  LV w20: R14.1 R13.2@3752.5,2282.78 ; R13.2@3760,2290.28 HRL30.5
NetB3: HRL30.4 R13.1 | length 249.6
  LV w10: R13.1 R13.1@3695.28,2286.18
  LV w20: HRL30.4 3660,2321.46 R13.1@3695.28,2286.18
NetD1: MOSFET1.1 P1.1 R2.2 R3.1 ZEN1.1 | length 837.8
  LV w20: P1.1 899.14,5919.14 899.14,5755.86 R3.1 1010,5755 1029,5736 ZEN1.1 MOSFET1.1 R2.2
NetD2: MOSFET2.1 P4.1 R5.2 R6.1 ZEN2.1 | length 925.8
  LV w10: R6.1 R6.1@1726.18,1547.82 ; ZEN2.1@1830.32,1547.82 1833.5,1551 R5.2
  LV w20: R6.1@1726.18,1547.82 ZEN2.1@1830.32,1547.82 ; R5.2 1830,1678.5 MOSFET2.1 P4.1
NetD3: MOSFET3.1 P10.1 R8.2 R9.1 ZEN3.1 | length 1171.9
  LV w10: 5830,5946.5 5831.5,5948 ; R8.2@5830,6211.5 R8.2 ; ZEN3.1 ZEN3.1@5831.18,6362.18 ; R9.1@5933.82,6362.18 R9.1
  LV w20: P10.1 5680,5765 MOSFET3.1 5830,5946.5 5830,6172.5 R8.2 ; R8.2@5830,6211.5 ZEN3.1 ; ZEN3.1@5831.18,6362.18 R9.1@5933.82,6362.18
NetD4: MOSFET4.1 P7.1 R11.2 R12.1 ZEN4.1 | length 1024
  LV w10: R12.1 R12.1@6486.18,1542.82 ; ZEN4.1@6583.5,1545.5 ZEN4.1 ZEN4.1@6583.82,1542.82
  LV w20: R12.1@6486.18,1542.82 ZEN4.1@6583.82,1542.82 ; ZEN4.1@6583.5,1545.5 R11.2 6580,1683.5 MOSFET4.1 P7.1
NetR1: GATE1.5 P2.1 R2.1 | length 468
  LV w20: P2.1 1208.5,6095 R2.1 GATE1.5
NetR2: GATE2.5 P5.1 R5.1 | length 509.6
  LV w20: GATE2.5 1516.72,1850 cw(c1516.72,1830) 1530.9,1844.1 1584.3,1790.7 cw(c1570.16,1776.56) 1584.35,1790.65 cw(c1481.47,1688.43) 1626.5,1688.43 R5.1 1545,1593.5 P5.1
NetR3: GATE3.5 P11.1 R8.1 | length 607
  LV w20: P11.1 6038.5,6298.5 R8.1 6038.5,6059.78 ccw(c6058.5,6059.78) 6044.32,6045.68 6140,5950 GATE3.5
NetR4: GATE4.5 P8.1 R11.1 | length 552.7
  LV w10: R11.1 R11.1@6380,1683.5
  LV w20: GATE4.5 6330,1890 6380,1840 R11.1@6380,1683.5 ; P8.1 6305,1608.5 R11.1
SIG1: GATE1.2 P3.1 SIG1.VIA | length 27108.7
  LV w20: P3.1 1110,6790 1208.96,6691.04 1208.96,6640.17 GATE1.2
  SIGLoop w20: SIG1.VIA@480,3330 1011.72,3330 ccw(c1011.72,3350) 1025.82,3335.82 1069.2,3379.2 ccw(c1055,3393.28) 1075,3393.28 1075,4541.72 1075,4541.78 ccw(c1055,4541.72) 1069.18,4555.82 1005.89,4619.1 ccw(c991.72,4605) 991.72,4625 460,4625 365.86,4719.14 365.82,4719.18 cw(c380,4733.28) 360,4733.28 360,7446.72 cw(c380,7446.72) 365.86,7460.86 425.86,7520.86 cw(c440,7506.72) 440,7526.72 3333.19,7526.72 3333.26,7526.72 cw(c3333.28,7470) 3390,7469.89 3390,7385 3390,7070 ccw(c3425,7070) 3425,7035 4639.91,7035 ccw(c4639.86,7080.14) 4685,7080.14 4685,7405 4685,7535.35 4685,7535.41 cw(c4754.78,7535.22) 4755.03,7605 7540,7605 cw(c7540,7530) 7615,7530 7615,4735 cw(c7565,4735) 7565,4685 7510,4685 7018.28,4685 7018.22,4685 ccw(c7018.28,4665) 7004.18,4679.18 6920.8,4595.8 ccw(c6935,4581.72) 6915,4581.78 6915,3488.28 ccw(c6935,3488.28) 6920.82,3474.18 6999.2,3395.8 ccw(c7013.28,3410) 7013.22,3390 7520,3390 7595,3390 cw(c7595,3345) 7640,3345.02 7640,495 cw(c7590,495) 7590,445 4790,445 cw(c4790,465) 4770,465 4770,535 4770,824.91 4770,824.97 ccw(c4720,825) 4720,875 3519.94,875 ccw(c3519.89,830.11) 3475,830.15 SIG1.VIA@3475,515
SIG2: GATE2.2 P6.1 SIG2.VIA | length 31020.1
  LV w20: GATE2.2 868.28,1850 868.22,1850 ccw(c868.28,1830) 854.18,1844.18 780.8,1770.8 ccw(c795,1756.72) 775,1756.78 775,1125 790,1110 P6.1 935,998.28 ccw(c955,998.28) 940.82,984.18 994.2,930.8 ccw(c1008.28,945) 1008.22,925 3196.72,925 cw(c3196.72,905) 3210.86,919.14 SIG2.VIA@3615,515
  SIGLoop w20: SIG2.VIA@480,3465 851.72,3465 ccw(c851.72,3485) 865.82,3470.82 919.18,3524.18 ccw(c905,3538.28) 925,3538.28 925,4406.72 ccw(c905,4406.72) 919.1,4420.9 860.8,4479.2 ccw(c846.72,4465) 846.72,4485 460,4485 340,4485 260.86,4564.14 260.82,4564.18 cw(c275,4578.28) 255,4578.28 255,7636.72 cw(c275,7636.72) 260.86,7650.86 274.14,7664.14 cw(c288.28,7650) 288.28,7670 3471.72,7670 cw(c3471.72,7650) 3485.86,7664.14 3519.18,7630.82 cw(c3505,7616.72) 3525,7616.78 3525,7616.72 3525,7385 3525,7175.06 ccw(c3575,7175) 3574.95,7125 3575.03,7125 4510,7125 ccw(c4509.89,7160.11) 4545,7160.11 4545,7405 4545,7639.91 4545,7639.97 cw(c4605.19,7639.81) 4605,7700 7630,7700 cw(c7630,7625) 7705,7625 7705,4600 cw(c7655,4600) 7655,4550 7510,4550 7128.28,4550 7128.22,4550 ccw(c7128.28,4530) 7114.18,4544.18 7030.8,4460.8 ccw(c7045,4446.72) 7025,4446.78 7025,3643.28 ccw(c7045,3643.28) 7030.82,3629.18 7124.2,3535.8 ccw(c7138.28,3550) 7138.22,3530 7520,3530 7524.14,3534.14 cw(c7538.28,3520) 7538.28,3540 7660,3540 cw(c7660,3465) 7735,3465.24 7735,395 cw(c7695,395) 7695,355 4680,355 cw(c4680,400) 4635,400 SIG2.VIA@4635,535 ; SIG2.VIA@3615,515 3615,710.21 cw(c3674.87,710.13) 3674.92,770 4590,770 cw(c4590,725) 4635,724.91 SIG2.VIA@4635,535.04
SIG3: GATE3.2 P12.1 SIG3.VIA | length 30728.4
  LV w20: SIG3.VIA@4395,7400 4734.14,7060.86 ccw(c4748.28,7075) 4748.28,7055 6600,7055 6660,6995 P12.1 6790,6890 6840,6840 6840,6083.28 cw(c6820,6083.28) 6834.18,6069.18 6720.82,5955.82 cw(c6706.72,5970) 6706.72,5950 GATE3.2
  SIGLoop w20: SIG3.VIA@480,3605 716.72,3605 ccw(c716.72,3625) 730.82,3610.82 799.18,3679.18 ccw(c785,3693.28) 805,3693.28 805,3970 805,4266.72 ccw(c785,4266.72) 799.18,4280.82 750.8,4329.2 ccw(c736.72,4315) 736.72,4335 465,4335 195,4335 160.86,4369.14 cw(c175,4383.28) 155,4383.28 155,7709.91 155,7709.97 cw(c220,7710) 220.05,7775 3615,7775 cw(c3615,7715) 3675,7715 3675,7403.28 cw(c3655,7403.28) 3669.14,7389.14 3665,7385 3665,7280.06 3665,7280 ccw(c3715,7280) 3715.03,7230 4355.13,7230 ccw(c4355,7270) 4395,7270 4395,7735.32 4395,7735.38 cw(c4459.8,7735.2) 4459.97,7800 7745,7800 cw(c7745,7735) 7810,7735 7810,4470 cw(c7750,4470) 7750,4410 7510,4410 7253.28,4410 7253.22,4410 ccw(c7253.28,4390) 7239.18,4404.18 7175.8,4340.8 ccw(c7190,4326.72) 7170,4326.78 7170,3753.28 ccw(c7190,3753.28) 7175.82,3739.18 7229.19,3685.81 ccw(c7243.28,3700) 7243.28,3680 7505.02,3680 7515,3680 7519.14,3684.14 cw(c7533.28,3670) 7533.28,3690 7750,3690 cw(c7750,3620) 7820,3620.22 7820,270 cw(c7774.18,270) 7774.18,224.18 4560.82,224.18 cw(c4560.82,290) 4495,290 4495,535 4495,609.91 ccw(c4450,610) 4450,655 3804.92,655 ccw(c3804.88,615.12) 3765,615.22 3765,615.16 SIG3.VIA@3765,520
SIG4: GATE4.2 P9.1 SIG4.VIA | length 31211.6
  LV w20: GATE4.2 5673.28,1890 5673.22,1890 ccw(c5673.28,1870) 5659.18,1884.18 5550.8,1775.8 ccw(c5565,1761.72) 5545,1761.78 5550,1420 5610,1360 P9.1 5680,1355 5680,1288.28 ccw(c5700,1288.28) 5685.82,1274.18 5724.2,1235.8 ccw(c5738.28,1250) 5738.22,1230 7120,1230 ccw(c7120,1320) 7210,1320 7210,3760 cw(c7275,3760) 7275,3825 SIG4.VIA@7515,3825
  SIGLoop w10: SIG4.VIA@475,4190 SIG4.VIA@477.5,4187.5 ; SIG4.VIA@477.5,3747.5 SIG4.VIA@480,3745 ; SIG4.VIA@3805,7385 SIG4.VIA@3807.5,7387.5 ; SIG4.VIA@3910,530 SIG4.VIA@3912.5,532.5 ; SIG4.VIA@4247.5,7387.5 SIG4.VIA@4250,7390 ; SIG4.VIA@4352.5,532.5 SIG4.VIA@4355,535 ; SIG4.VIA@7510,4270 SIG4.VIA@7512.5,4267.5 ; SIG4.VIA@7512.5,3827.5 SIG4.VIA@7515,3825
  SIGLoop w20: SIG4.VIA@475,4190 100,4190 65,4225 65,7815 105,7855 3741.56,7855 cw(c3741.56,7835) 3755.67,7849.17 3794.54,7810.73 cw(c3780.48,7796.51) 3796.48,7808.51 3800.48,7796.74 SIG4.VIA@3805,7385 ; SIG4.VIA@477.5,3747.5 SIG4.VIA@477.5,4187.5 ; SIG4.VIA@3807.5,7387.5 SIG4.VIA@4247.5,7387.5 ; SIG4.VIA@3912.5,532.5 SIG4.VIA@4352.5,532.5 ; SIG4.VIA@4250,7390 4250,7814.91 cw(c4320.22,7814.78) 4320,7885 4320.06,7885 7821.72,7885 cw(c7821.72,7865) 7835.8,7879.2 7899.14,7815.86 cw(c7885,7801.72) 7905,7801.72 7905,4350 cw(c7825,4350) 7825,4270 SIG4.VIA@7510,4270 ; SIG4.VIA@4355,535 4355,175 4385,145 7845,145 7880,180 7880,3756.72 7880,3756.78 ccw(c7860,3756.72) 7874.18,3770.82 7825.8,3819.2 ccw(c7811.72,3805) 7811.72,3825 SIG4.VIA@7515,3825 ; SIG4.VIA@7512.5,3827.5 SIG4.VIA@7512.5,4267.5
pads on no net: HRL30.2 HRL30.6 HRL30.8 HRL30.9 HRL30.10 HRL30.11

## Other copper
Multi-Layer:
  the board outline again, w10

## Text inside footprints (layer, text, board x,y; h text height)
GATE1: Top Overlay "*" at 1277.08,6661.63 h50 r270; Mechanical 13 "*" at 1247.06,6590.14 h50 r270
GATE2: Top Overlay "*" at 1038.37,1917.08 h50; Mechanical 13 "*" at 1109.86,1887.06 h50
GATE3: Top Overlay "*" at 6631.63,5882.92 h50 r180; Mechanical 13 "*" at 6560.14,5912.94 h50 r180
GATE4: Top Overlay "*" at 5793.37,1957.08 h50; Mechanical 13 "*" at 5864.86,1927.06 h50
ZEN1: Top Overlay "*" at 1044,5674 h20 r180; Mechanical 13 "*" at 1018.5,5660 h50 r180
ZEN2: Top Overlay "*" at 1796,1564 h20 r270; Mechanical 13 "*" at 1810,1538.5 h50 r270
ZEN3: Top Overlay "*" at 5869,6346 h20 r90; Mechanical 13 "*" at 5855,6371.5 h50 r90
ZEN4: Top Overlay "*" at 6546,1559 h20 r270; Mechanical 13 "*" at 6560,1533.5 h50 r270